# EAGLE board H-bridge-layout (EAGLE 9.6.2)
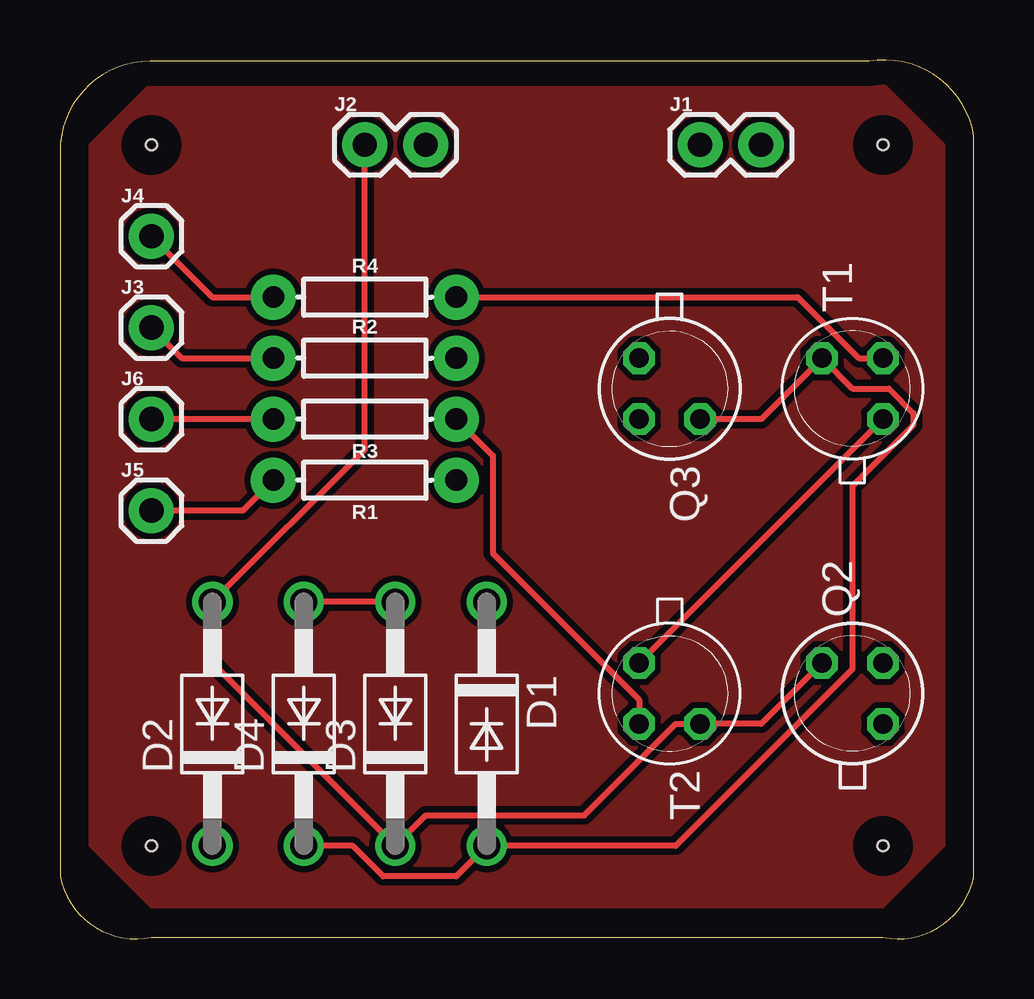
[diagram p0: board, top side]
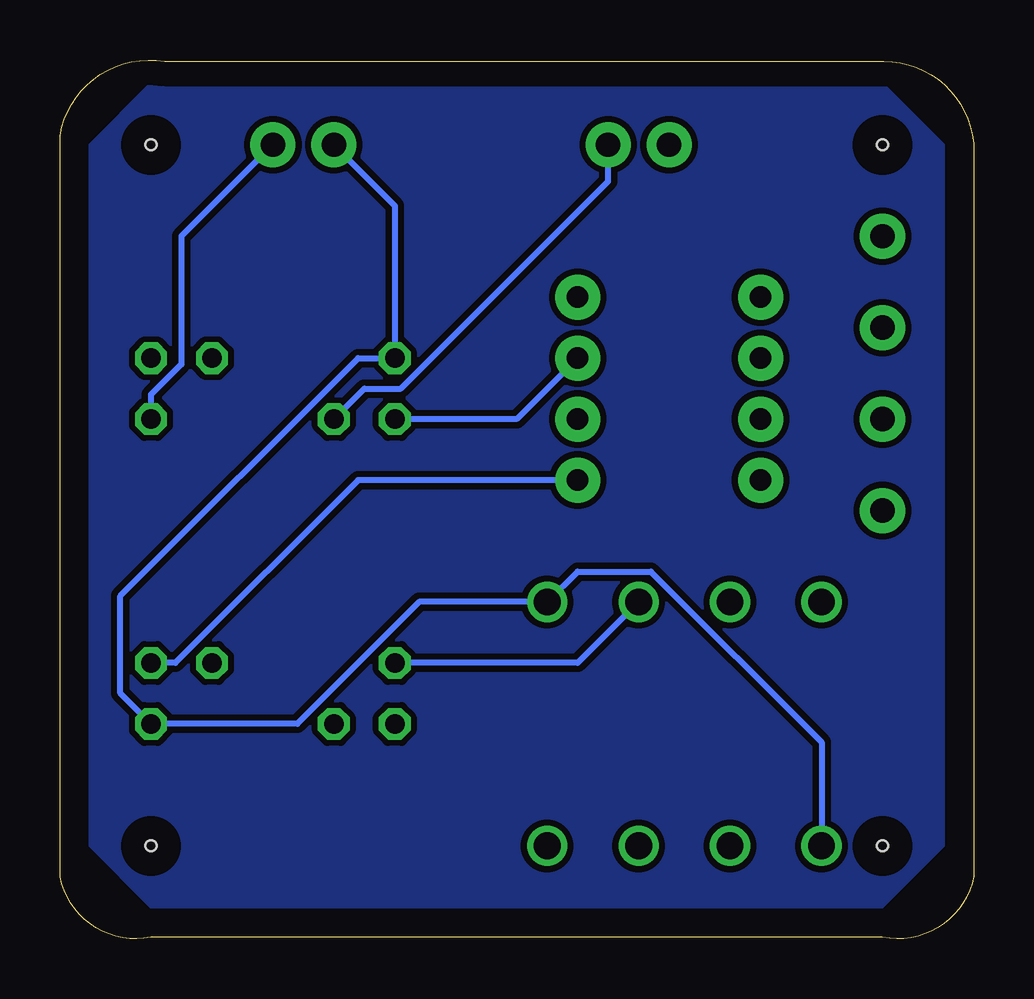
[diagram p1: board, bottom side, seen from below]

Size 38.08 x 36.62 mm. Coordinates in mm from the lower left corner, seen from the top.
Outline: 33.71,36.56 3.75,36.56 arc90 0,32.81 0,2.6 arc90 3.81,0.06 34.29,0.06 arc90 38.08,2.58 38.08,33.47 arc90 33.71,36.56
Copper layers (1*16): Top 0.035mm / dielectric 1.5mm / Bottom 0.035mm
Design rules "default *": minimum track width 10mil, minimum drill 0.35mm, track to track 10mil, track to pad 10mil, pad to pad 6mil, via to via 6mil, smd to smd 6mil, copper to edge 40mil, drill to drill 6mil, minimum pad ring 10mil, minimum via ring 8mil, stop-mask expansion 4mil, vias tented up to drill 0mil, thermal gap 10mil
Holes 0.45 mm at 3.81,33.08 34.29,33.08 34.29,3.87 3.81,3.87

## Footprints (pad centres in the part's own frame; a part is rotated, then mirrored left to right if it is on the bottom)
DO41-10 = drill 1.118: A 5.08,0; C -5.08,0
1X02 = drill 1.016 pad 1.88: 1 0,0; 2 2.54,0
1X01 = drill 1.016 pad 1.88: 1 0,0
TO18 = drill 0.813 octagon: 1 -1.27,-1.27; 2 1.27,-1.27; 3 1.27,1.27
AXIAL-0.3 = drill 0.9 pad 1.88: P$1 -3.81,0; P$2 3.81,0

## Placement (x,y rotation side)
D1  1N4004  [DO41-10]  17.78,8.95 270 top
D2  1N4004  [DO41-10]  6.35,8.95 90 top
D3  1N4004  [DO41-10]  13.97,8.95 90 top
D4  1N4004  [DO41-10]  10.16,8.95 90 top
J1  [1X02]  26.67,33.08 0 top
J2  [1X02]  12.7,33.08 0 top
J3  [1X01]  3.81,25.46 0 top
J4  [1X01]  3.81,29.27 0 top
J5  [1X01]  3.81,17.84 0 top
J6  [1X01]  3.81,21.65 0 top
Q2  2N2907  [TO18]  33.02,10.22 90 top
Q3  2N2907  [TO18]  25.4,22.92 270 top
R1  1k  [AXIAL-0.3]  12.7,19.11 180 top
R2  1k  [AXIAL-0.3]  12.7,24.19 0 top
R3  1k  [AXIAL-0.3]  12.7,21.65 180 top
R4  1k  [AXIAL-0.3]  12.7,26.73 0 top
T1  2N2222  [TO18]  33.02,22.92 90 top
T2  2N2222  [TO18]  25.4,10.22 270 top

## Library data of the parts
D1-D4 = diode
J1-J6 = SparkFun-Connectors
Q2 Q3 = transistor-pnp
R1-R4 = SparkFun-Resistors; PROD_ID: RES-12182
T1 T2 = transistor

## Nets
N$1: D2.A D3.C J2.1 Q2.3 T2.3
N$2: D3.A D4.A J1.2 T1.1 T2.1
N$3: D1.A D4.C J2.2 Q3.3 T1.3
N$4: D1.C D2.C J1.1 Q2.1 Q3.1
N$5: J3.1 R2.P$1
N$6: Q3.2 R2.P$2
N$7: J4.1 R4.P$1
N$8: R4.P$2 T1.2
N$9: Q2.2 R1.P$1
N$10: J5.1 R1.P$2
N$11: R3.P$1 T2.2
N$12: J6.1 R3.P$2

## Tracks (layer width: path | path; a pad name or v marks a point on that pad's centre or on a via)
N$1
  Top 0.254: Q2.3 29.21,8.95 T2.3 25.65,8.95 21.84,5.14 15.24,5.14 D3.C 6.35,11.49 D2.A 12.7,20.38 J2.1
N$2
  Top 0.254: D3.A D4.A | T1.1 T2.1
  Bottom 0.254: T2.1 16.51,11.49 D3.A | T1.1 34.29,22.67 33.02,23.94 33.02,29.27 J1.2
N$3
  Top 0.254: D4.C 12.19,3.87 13.46,2.6 16.51,2.6 D1.A 25.65,3.87 33.02,11.24 33.02,18.86 35.56,21.4 35.56,21.91 34.54,22.92 33.02,22.92 T1.3 29.21,21.65 Q3.3
  Bottom 0.254: J2.2 15.24,31.56 23.88,22.92 25.4,22.92 Q3.3
N$4
  Bottom 0.254: J1.1 24.13,30.54 Q3.1 25.65,24.19 35.56,14.29 35.56,10.22 Q2.1 28.19,8.95 23.11,14.03 D1.C 16.51,15.3 13.46,15.3 6.35,8.19 D2.C
N$5
  Top 0.254: R2.P$1 5.08,24.19 J3.1
N$6
  Bottom 0.254: Q3.2 19.05,21.65 R2.P$2
N$7
  Top 0.254: R4.P$1 6.35,26.73 J4.1
N$8
  Top 0.254: T1.2 33.27,24.19 30.73,26.73 R4.P$2
N$9
  Bottom 0.254: Q2.2 33.27,11.49 25.65,19.11 R1.P$1
N$10
  Top 0.254: J5.1 7.62,17.84 R1.P$2
N$11
  Top 0.254: T2.2 24.13,9.97 18.03,16.06 18.03,20.13 R3.P$1
N$12
  Top 0.254: R3.P$2 J6.1
SIGNAL1
  pour Top: 1.27,33.08 3.81,35.62 34.29,35.62 36.83,33.08 36.83,3.87 34.29,1.33 3.81,1.33 1.27,3.87
SIGNAL2
  pour Bottom: 1.27,33.08 3.81,35.62 34.29,35.62 36.83,33.08 36.83,3.87 34.29,1.33 3.81,1.33 1.27,3.87